# Altium PCB PowerBoard.PcbDoc (part 2 of 2)
Units mm, origin at the board's own origin, x right, y up, seen from the top; angles counter-clockwise.
Board outline 110 x 150 mm, 4 copper layers (Top Layer, Signal Layer 1, Signal Layer 2, Bottom Layer), stack 2.22 mm thick; 73 components, 20 nets, 361 pads, 2847 vias.
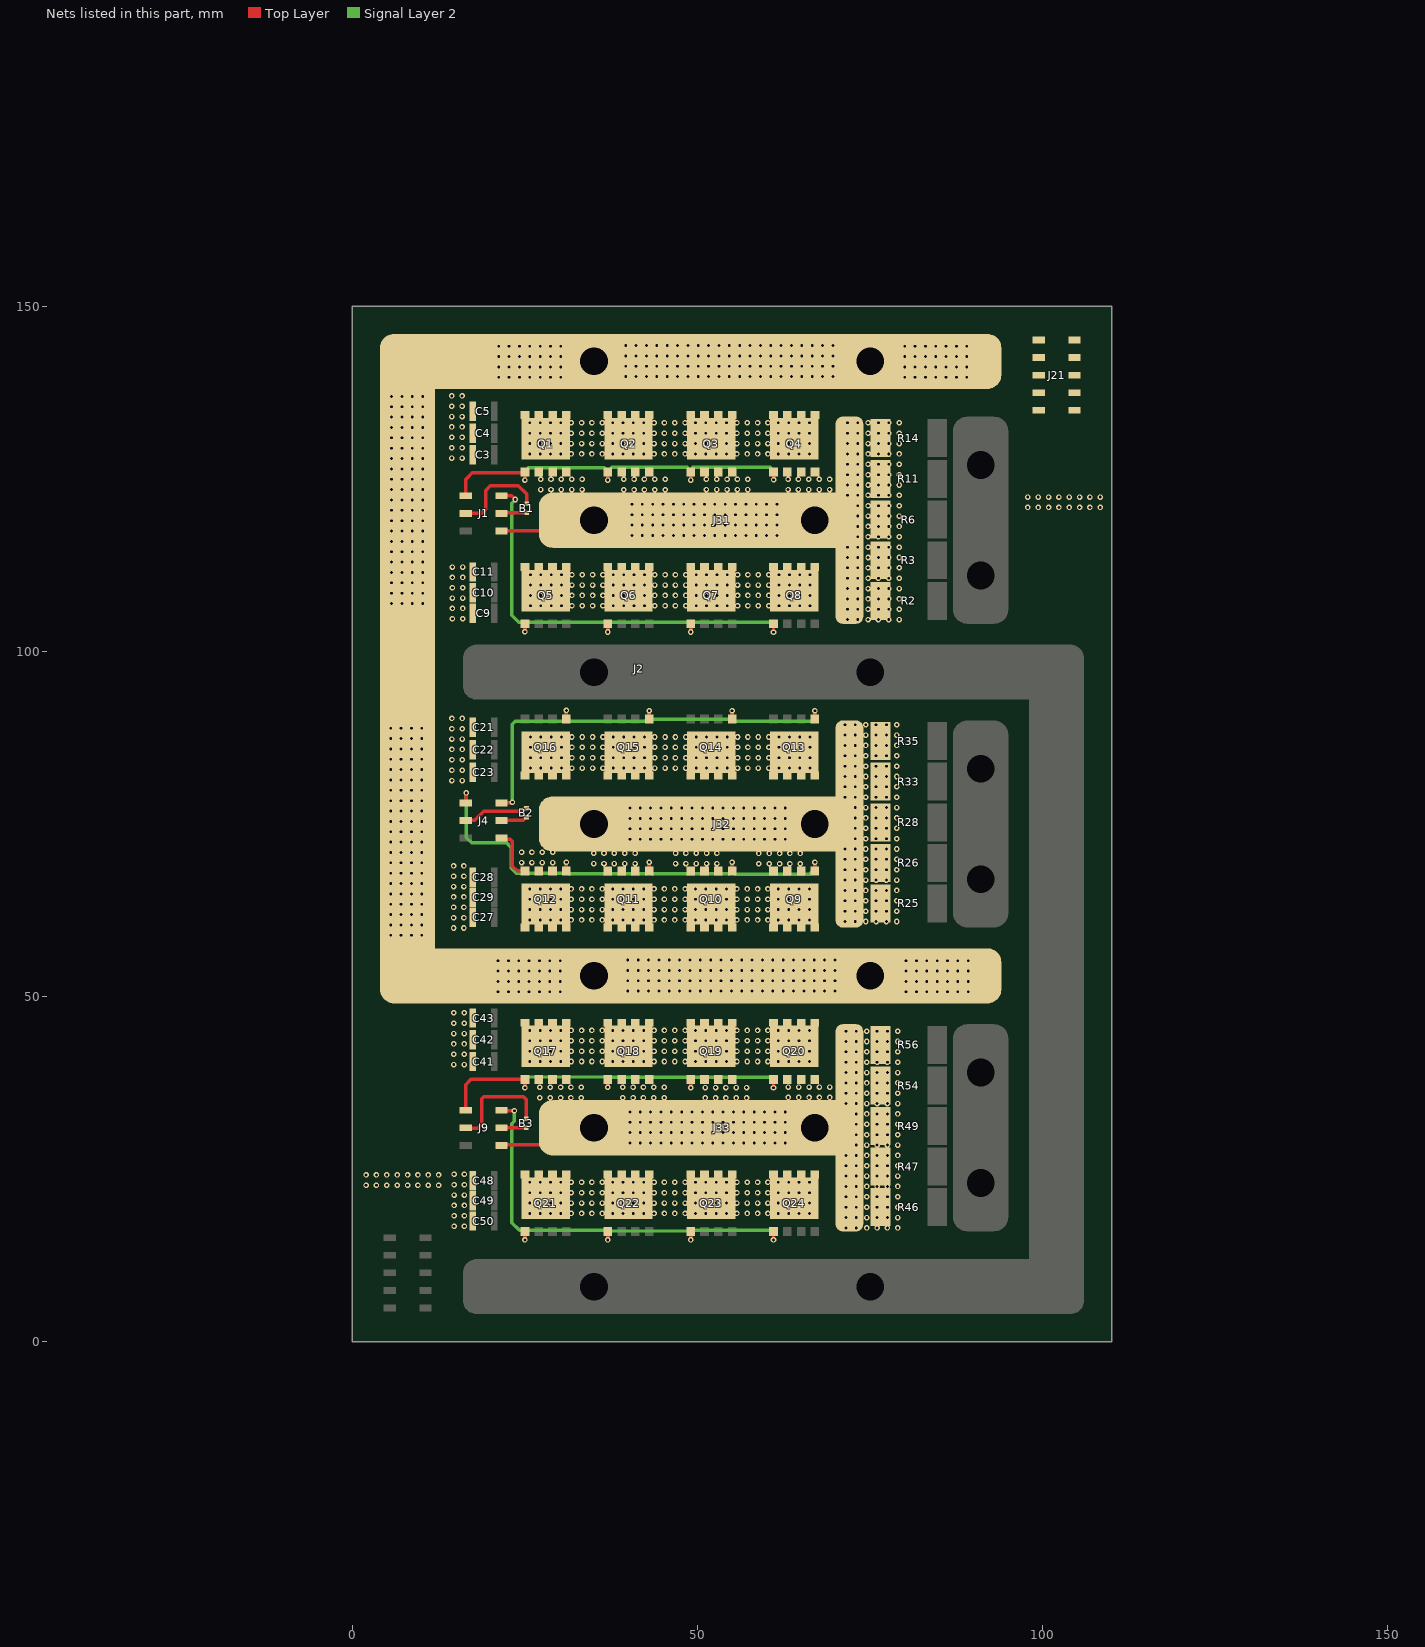
[diagram p4: the nets of this part, all layers, seen from the top]

## Via types
v1: diameter 0.8, hole 0.4, Top Layer to Bottom Layer, tented both sides, 2847 vias

## Nets (pads, with @x,y where several pads share a name; then routed paths per layer and width w, separated by ;. In a path a pad name is that pad's centre, name@x,y a point inside that pad or via, vN(x,y) a via of type N, cw(c..) or ccw(c..) an arc to the next point about the centre after c; other vN are vias at no path point) (continued)
PHASE_U: J1.6 J31.1 Q1.SOURCE Q2.SOURCE Q3.SOURCE Q4.SOURCE Q5.DRAIN Q6.DRAIN Q7.DRAIN Q8.DRAIN R2.2 R3.2 R6.2 R11.2 R14.2 | length 31.4
  Top Layer w0.5: J1.6@21.6,117.46 31.972,117.46 32.459,117.948 33.972,117.948 35,116.92 36.075,117.995 37.425,117.995 38.501,116.92 48,116.92 49.18,118.1 49.7,118.1 J31.1@50.6,119
  other v1: 71.7,104.6 73.2,104.6 74.7,104.6 76.2,104.6 77.7,104.6 79.2,104.6 71.7,106.1 73.2,106.1 74.7,106.1 76.2,106.1 77.7,106.1 79.2,106.1 25.8,106.6 27.3,106.6 28.8,106.6 30.3,106.6 31.8,106.6 33.3,106.6 34.8,106.6 36.3,106.6 37.8,106.6 39.3,106.6 40.8,106.6 42.3,106.6 43.8,106.6 45.3,106.6 46.8,106.6 48.3,106.6 49.8,106.6 51.3,106.6 52.8,106.6 54.3,106.6 55.8,106.6 57.3,106.6 58.8,106.6 60.3,106.6 61.8,106.6 63.3,106.6 64.8,106.6 66.3,106.6 71.7,107.6 73.2,107.6 74.7,107.6 76.2,107.6 77.7,107.6 79.2,107.6 25.8,108.1 27.3,108.1 28.8,108.1 30.3,108.1 31.8,108.1 33.3,108.1 34.8,108.1 36.3,108.1 37.8,108.1 39.3,108.1 40.8,108.1 42.3,108.1 43.8,108.1 45.3,108.1 46.8,108.1 48.3,108.1 49.8,108.1 51.3,108.1 52.8,108.1 54.3,108.1 55.8,108.1 57.3,108.1 58.8,108.1 60.3,108.1 61.8,108.1 63.3,108.1 64.8,108.1 66.3,108.1 71.7,109.1 73.2,109.1 74.7,109.1 76.2,109.1 77.7,109.1 79.2,109.1 25.8,109.6 27.3,109.6 28.8,109.6 30.3,109.6 31.8,109.6 33.3,109.6 34.8,109.6 36.3,109.6 37.8,109.6 39.3,109.6 40.8,109.6 42.3,109.6 43.8,109.6 45.3,109.6 46.8,109.6 48.3,109.6 49.8,109.6 51.3,109.6 52.8,109.6 54.3,109.6 55.8,109.6 57.3,109.6 58.8,109.6 60.3,109.6 61.8,109.6 63.3,109.6 64.8,109.6 66.3,109.6 71.7,110.6 73.2,110.6 74.7,110.6 76.2,110.6 77.7,110.6 79.2,110.6 25.8,111.1 27.3,111.1 28.8,111.1 30.3,111.1 31.8,111.1 33.3,111.1 34.8,111.1 36.3,111.1 37.8,111.1 39.3,111.1 40.8,111.1 42.3,111.1 43.8,111.1 45.3,111.1 46.8,111.1 48.3,111.1 49.8,111.1 51.3,111.1 52.8,111.1 54.3,111.1 55.8,111.1 57.3,111.1 58.8,111.1 60.3,111.1 61.8,111.1 63.3,111.1 64.8,111.1 66.3,111.1 71.7,112.1 73.2,112.1 74.7,112.1 76.2,112.1 77.7,112.1 79.2,112.1 71.7,113.6 73.2,113.6 74.7,113.6 76.2,113.6 77.7,113.6 79.2,113.6 71.7,115.1 73.2,115.1 74.7,115.1 76.2,115.1 77.7,115.1 79.2,115.1 73.2,116.6 74.7,116.6 76.2,116.6 77.7,116.6 79.2,116.6 40.5,116.8 42,116.8 43.5,116.8 45,116.8 46.5,116.8 48,116.8 49.5,116.8 51,116.8 52.5,116.8 54,116.8 55.5,116.8 57,116.8 58.5,116.8 60,116.8 61.5,116.8 73.2,118.1 74.7,118.1 76.2,118.1 77.7,118.1 79.2,118.1 40.5,118.3 42,118.3 43.5,118.3 45,118.3 46.5,118.3 48,118.3 49.5,118.3 51,118.3 52.5,118.3 54,118.3 55.5,118.3 57,118.3 58.5,118.3 60,118.3 61.5,118.3 73.2,119.6 74.7,119.6 76.2,119.6 77.7,119.6 79.2,119.6 40.5,119.8 42,119.8 43.5,119.8 45,119.8 46.5,119.8 48,119.8 49.5,119.8 51,119.8 52.5,119.8 54,119.8 55.5,119.8 57,119.8 58.5,119.8 60,119.8 61.5,119.8 73.2,121.1 74.7,121.1 76.2,121.1 77.7,121.1 79.2,121.1 40.5,121.3 42,121.3 43.5,121.3 45,121.3 46.5,121.3 48,121.3 49.5,121.3 51,121.3 52.5,121.3 54,121.3 55.5,121.3 57,121.3 58.5,121.3 60,121.3 61.5,121.3 71.7,122.6 73.2,122.6 74.7,122.6 76.2,122.6 77.7,122.6 79.2,122.6 39.314,123.419 40.814,123.419 42.314,123.419 43.814,123.419 45.314,123.419 27.274,123.444 28.774,123.444 30.274,123.444 31.774,123.444 33.274,123.444 51.277,123.444 52.777,123.444 54.277,123.444 55.777,123.444 57.277,123.444 63.113,123.444 64.613,123.444 66.113,123.444 67.613,123.444 69.113,123.444 71.7,124.1 73.2,124.1 74.7,124.1 76.2,124.1 77.7,124.1 79.2,124.1 39.314,124.919 40.814,124.919 42.314,124.919 43.814,124.919 45.314,124.919 27.274,124.944 28.774,124.944 30.274,124.944 31.774,124.944 33.274,124.944 51.277,124.944 52.777,124.944 54.277,124.944 55.777,124.944 57.277,124.944 63.113,124.944 64.613,124.944 66.113,124.944 67.613,124.944 69.113,124.944 71.7,125.6 73.2,125.6 74.7,125.6 76.2,125.6 77.7,125.6 79.2,125.6 71.7,127.1 73.2,127.1 74.7,127.1 76.2,127.1 77.7,127.1 79.2,127.1 71.7,128.6 73.2,128.6 74.7,128.6 76.2,128.6 77.7,128.6 79.2,128.6 71.7,130.1 73.2,130.1 74.7,130.1 76.2,130.1 77.7,130.1 79.2,130.1 71.7,131.6 73.2,131.6 74.7,131.6 76.2,131.6 77.7,131.6 79.2,131.6 71.7,133.1 73.2,133.1 74.7,133.1 76.2,133.1 77.7,133.1 79.2,133.1
PHASE_V: J4.6 J32.1 Q9.SOURCE Q10.SOURCE Q11.SOURCE Q12.SOURCE Q13.DRAIN Q14.DRAIN Q15.DRAIN Q16.DRAIN R25.2 R26.2 R28.2 R33.2 R35.2 | length 7.5
  Top Layer w0.5: J4.6@21.6,72.96 21.763,72.797 22.897,72.797 23.19,72.504 23.19,68.885 23.865,68.21 Q12.SOURCE@25,68.21
  other v1: 71.35,60.879 72.85,60.879 74.35,60.879 75.85,60.879 77.35,60.879 78.85,60.879 71.35,62.379 72.85,62.379 74.35,62.379 75.85,62.379 77.35,62.379 78.85,62.379 71.35,63.879 72.85,63.879 74.35,63.879 75.85,63.879 77.35,63.879 78.85,63.879 71.35,65.379 72.85,65.379 74.35,65.379 75.85,65.379 77.35,65.379 78.85,65.379 71.35,66.879 72.85,66.879 74.35,66.879 75.85,66.879 77.35,66.879 78.85,66.879 71.35,68.379 72.85,68.379 74.35,68.379 75.85,68.379 77.35,68.379 78.85,68.379 58.877,69.24 60.377,69.24 61.877,69.24 63.377,69.24 64.877,69.24 34.95,69.266 36.45,69.266 37.95,69.266 39.45,69.266 40.95,69.266 46.812,69.266 48.312,69.266 49.812,69.266 51.312,69.266 52.812,69.266 24.512,69.418 26.012,69.418 27.512,69.418 29.012,69.418 71.35,69.879 72.85,69.879 74.35,69.879 75.85,69.879 77.35,69.879 78.85,69.879 58.877,70.74 60.377,70.74 61.877,70.74 63.377,70.74 64.877,70.74 34.95,70.766 36.45,70.766 37.95,70.766 39.45,70.766 40.95,70.766 46.812,70.766 48.312,70.766 49.812,70.766 51.312,70.766 52.812,70.766 24.512,70.918 26.012,70.918 27.512,70.918 29.012,70.918 71.35,71.379 72.85,71.379 74.35,71.379 75.85,71.379 77.35,71.379 78.85,71.379 40.2,72.8 41.7,72.8 43.2,72.8 44.7,72.8 46.2,72.8 47.7,72.8 49.2,72.8 50.7,72.8 52.2,72.8 53.7,72.8 55.2,72.8 56.7,72.8 58.2,72.8 59.7,72.8 61.2,72.8 62.7,72.8 72.85,72.879 74.35,72.879 75.85,72.879 77.35,72.879 78.85,72.879 40.2,74.3 41.7,74.3 43.2,74.3 44.7,74.3 46.2,74.3 47.7,74.3 49.2,74.3 50.7,74.3 52.2,74.3 53.7,74.3 55.2,74.3 56.7,74.3 58.2,74.3 59.7,74.3 61.2,74.3 62.7,74.3 72.85,74.379 74.35,74.379 75.85,74.379 77.35,74.379 78.85,74.379 40.2,75.8 41.7,75.8 43.2,75.8 44.7,75.8 46.2,75.8 47.7,75.8 49.2,75.8 50.7,75.8 52.2,75.8 53.7,75.8 55.2,75.8 56.7,75.8 58.2,75.8 59.7,75.8 61.2,75.8 62.7,75.8 72.85,75.879 74.35,75.879 75.85,75.879 77.35,75.879 78.85,75.879 40.2,77.3 41.7,77.3 43.2,77.3 44.7,77.3 46.2,77.3 47.7,77.3 49.2,77.3 50.7,77.3 52.2,77.3 53.7,77.3 55.2,77.3 56.7,77.3 58.2,77.3 59.7,77.3 61.2,77.3 62.7,77.3 72.85,77.379 74.35,77.379 75.85,77.379 77.35,77.379 78.85,77.379 71.35,78.879 72.85,78.879 74.35,78.879 75.85,78.879 77.35,78.879 78.85,78.879 71.35,80.379 72.85,80.379 74.35,80.379 75.85,80.379 77.35,80.379 78.85,80.379 71.35,81.879 72.85,81.879 74.35,81.879 75.85,81.879 77.35,81.879 78.85,81.879 25.8,83.1 27.3,83.1 28.8,83.1 30.3,83.1 31.8,83.1 33.3,83.1 34.8,83.1 36.3,83.1 37.8,83.1 39.3,83.1 40.8,83.1 42.3,83.1 43.8,83.1 45.3,83.1 46.8,83.1 48.3,83.1 49.8,83.1 51.3,83.1 52.8,83.1 54.3,83.1 55.8,83.1 57.3,83.1 58.8,83.1 60.3,83.1 61.8,83.1 63.3,83.1 64.8,83.1 66.3,83.1 71.35,83.379 72.85,83.379 74.35,83.379 75.85,83.379 77.35,83.379 78.85,83.379 25.8,84.6 27.3,84.6 28.8,84.6 30.3,84.6 31.8,84.6 33.3,84.6 34.8,84.6 36.3,84.6 37.8,84.6 39.3,84.6 40.8,84.6 42.3,84.6 43.8,84.6 45.3,84.6 46.8,84.6 48.3,84.6 49.8,84.6 51.3,84.6 52.8,84.6 54.3,84.6 55.8,84.6 57.3,84.6 58.8,84.6 60.3,84.6 61.8,84.6 63.3,84.6 64.8,84.6 66.3,84.6 71.35,84.879 72.85,84.879 74.35,84.879 75.85,84.879 77.35,84.879 78.85,84.879 25.8,86.1 27.3,86.1 28.8,86.1 30.3,86.1 31.8,86.1 33.3,86.1 34.8,86.1 36.3,86.1 37.8,86.1 39.3,86.1 40.8,86.1 42.3,86.1 43.8,86.1 45.3,86.1 46.8,86.1 48.3,86.1 49.8,86.1 51.3,86.1 52.8,86.1 54.3,86.1 55.8,86.1 57.3,86.1 58.8,86.1 60.3,86.1 61.8,86.1 63.3,86.1 64.8,86.1 66.3,86.1 71.35,86.379 72.85,86.379 74.35,86.379 75.85,86.379 77.35,86.379 78.85,86.379 25.8,87.6 27.3,87.6 28.8,87.6 30.3,87.6 31.8,87.6 33.3,87.6 34.8,87.6 36.3,87.6 37.8,87.6 39.3,87.6 40.8,87.6 42.3,87.6 43.8,87.6 45.3,87.6 46.8,87.6 48.3,87.6 49.8,87.6 51.3,87.6 52.8,87.6 54.3,87.6 55.8,87.6 57.3,87.6 58.8,87.6 60.3,87.6 61.8,87.6 63.3,87.6 64.8,87.6 66.3,87.6 71.35,87.879 72.85,87.879 74.35,87.879 75.85,87.879 77.35,87.879 78.85,87.879 71.35,89.379 72.85,89.379 74.35,89.379 75.85,89.379 77.35,89.379 78.85,89.379
PHASE_W: J9.6 J33.1 Q17.SOURCE Q18.SOURCE Q19.SOURCE Q20.SOURCE Q21.DRAIN Q22.DRAIN Q23.DRAIN Q24.DRAIN R46.2 R47.2 R49.2 R54.2 R56.2 | length 6
  Top Layer w0.5: J9.6@21.643,28.524 J33.1@27.137,28.524 ; Q21.DRAIN@25.05,24.21 Q21.DRAIN@25.375,24.535
  other v1: 71.5,16.5 73,16.5 74.5,16.5 76,16.5 77.5,16.5 79,16.5 71.5,18 73,18 74.5,18 76,18 77.5,18 79,18 25.7,18.6 27.2,18.6 28.7,18.6 30.2,18.6 31.7,18.6 33.2,18.6 34.7,18.6 36.2,18.6 37.7,18.6 39.2,18.6 40.7,18.6 42.2,18.6 43.7,18.6 45.2,18.6 46.7,18.6 48.2,18.6 49.7,18.6 51.2,18.6 52.7,18.6 54.2,18.6 55.7,18.6 57.2,18.6 58.7,18.6 60.2,18.6 61.7,18.6 63.2,18.6 64.7,18.6 66.2,18.6 71.5,19.5 73,19.5 74.5,19.5 76,19.5 77.5,19.5 79,19.5 25.7,20.1 27.2,20.1 28.7,20.1 30.2,20.1 31.7,20.1 33.2,20.1 34.7,20.1 36.2,20.1 37.7,20.1 39.2,20.1 40.7,20.1 42.2,20.1 43.7,20.1 45.2,20.1 46.7,20.1 48.2,20.1 49.7,20.1 51.2,20.1 52.7,20.1 54.2,20.1 55.7,20.1 57.2,20.1 58.7,20.1 60.2,20.1 61.7,20.1 63.2,20.1 64.7,20.1 66.2,20.1 71.5,21 73,21 74.5,21 76,21 77.5,21 79,21 25.7,21.6 27.2,21.6 28.7,21.6 30.2,21.6 31.7,21.6 33.2,21.6 34.7,21.6 36.2,21.6 37.7,21.6 39.2,21.6 40.7,21.6 42.2,21.6 43.7,21.6 45.2,21.6 46.7,21.6 48.2,21.6 49.7,21.6 51.2,21.6 52.7,21.6 54.2,21.6 55.7,21.6 57.2,21.6 58.7,21.6 60.2,21.6 61.7,21.6 63.2,21.6 64.7,21.6 66.2,21.6 71.5,22.5 73,22.5 74.5,22.5 76,22.5 77.5,22.5 79,22.5 25.7,23.1 27.2,23.1 28.7,23.1 30.2,23.1 31.7,23.1 33.2,23.1 34.7,23.1 36.2,23.1 37.7,23.1 39.2,23.1 40.7,23.1 42.2,23.1 43.7,23.1 45.2,23.1 46.7,23.1 48.2,23.1 49.7,23.1 51.2,23.1 52.7,23.1 54.2,23.1 55.7,23.1 57.2,23.1 58.7,23.1 60.2,23.1 61.7,23.1 63.2,23.1 64.7,23.1 66.2,23.1 71.5,24 73,24 74.5,24 76,24 77.5,24 79,24 71.5,25.5 73,25.5 74.5,25.5 76,25.5 77.5,25.5 79,25.5 71.5,27 73,27 74.5,27 76,27 77.5,27 79,27 73,28.5 74.5,28.5 76,28.5 77.5,28.5 79,28.5 40.2,28.8 41.7,28.8 43.2,28.8 44.7,28.8 46.2,28.8 47.7,28.8 49.2,28.8 50.7,28.8 52.2,28.8 53.7,28.8 55.2,28.8 56.7,28.8 58.2,28.8 59.7,28.8 61.2,28.8 62.7,28.8 73,30 74.5,30 76,30 77.5,30 79,30 40.2,30.3 41.7,30.3 43.2,30.3 44.7,30.3 46.2,30.3 47.7,30.3 49.2,30.3 50.7,30.3 52.2,30.3 53.7,30.3 55.2,30.3 56.7,30.3 58.2,30.3 59.7,30.3 61.2,30.3 62.7,30.3 73,31.5 74.5,31.5 76,31.5 77.5,31.5 79,31.5 40.2,31.8 41.7,31.8 43.2,31.8 44.7,31.8 46.2,31.8 47.7,31.8 49.2,31.8 50.7,31.8 52.2,31.8 53.7,31.8 55.2,31.8 56.7,31.8 58.2,31.8 59.7,31.8 61.2,31.8 62.7,31.8 73,33 74.5,33 76,33 77.5,33 79,33 40.2,33.3 41.7,33.3 43.2,33.3 44.7,33.3 46.2,33.3 47.7,33.3 49.2,33.3 50.7,33.3 52.2,33.3 53.7,33.3 55.2,33.3 56.7,33.3 58.2,33.3 59.7,33.3 61.2,33.3 62.7,33.3 71.5,34.5 73,34.5 74.5,34.5 76,34.5 77.5,34.5 79,34.5 51.105,35.33 52.605,35.33 54.105,35.33 55.605,35.33 57.105,35.33 27.153,35.355 28.653,35.355 30.153,35.355 31.653,35.355 33.153,35.355 39.167,35.355 40.667,35.355 42.167,35.355 43.667,35.355 45.167,35.355 63.144,35.406 64.644,35.406 66.144,35.406 67.644,35.406 69.144,35.406 71.5,36 73,36 74.5,36 76,36 77.5,36 79,36 51.105,36.83 52.605,36.83 54.105,36.83 55.605,36.83 57.105,36.83 27.153,36.855 28.653,36.855 30.153,36.855 31.653,36.855 33.153,36.855 39.167,36.855 40.667,36.855 42.167,36.855 43.667,36.855 45.167,36.855 63.144,36.906 64.644,36.906 66.144,36.906 67.644,36.906 69.144,36.906 71.5,37.5 73,37.5 74.5,37.5 76,37.5 77.5,37.5 79,37.5 71.5,39 73,39 74.5,39 76,39 77.5,39 79,39 71.5,40.5 73,40.5 74.5,40.5 76,40.5 77.5,40.5 79,40.5 71.5,42 73,42 74.5,42 76,42 77.5,42 79,42 71.5,43.5 73,43.5 74.5,43.5 76,43.5 77.5,43.5 79,43.5 71.5,45 73,45 74.5,45 76,45 77.5,45 79,45
PWM_U_HIGH: J1.1 Q1.GATE Q2.GATE Q3.GATE Q4.GATE | length 58.7
  Top Layer w0.5: J1.1@16.457,122.54 16.457,124.957 17.394,125.894 24.894,125.894 Q1.GATE@25.005,126.005 v1(25.005,124.812) ; v1(37,124.812) Q2.GATE@37,126.005 ; v1(49.007,124.812) Q3.GATE@49.007,126.005 ; v1(61.007,124.862) Q4.GATE@61.007,125.902
  Signal Layer 2 w0.5: v1(25.005,124.812) 25.005,126.147 25.476,126.619 36.474,126.619 37,126.093 ; v1(37,124.812) 37,126.093 ; v1(49.007,124.812) 49.007,126.125 ; v1(61.007,124.862) 61.007,126.191 60.554,126.644 49.3,126.644 49.007,126.352 49.007,126.125 ; 37,126.093 37.551,126.644 48.487,126.644 48.858,126.274 49.007,126.125
PWM_U_LOW: J1.2 Q5.GATE Q6.GATE Q7.GATE Q8.GATE | length 68.1
  Top Layer w0.5: J1.2@21.6,122.54 23.06,122.54 v1(23.6,122) ; v1(25,102.857) Q5.GATE@25,104 ; v1(37,102.807) Q6.GATE@37,104 ; v1(49,102.807) Q7.GATE@49,104 ; v1(61,102.757) Q8.GATE@61,104
  Signal Layer 2 w0.5: v1(23.6,122) 23.6,121.919 23.114,121.433 23.114,105.232 24.105,104.242 25.476,104.242 ; v1(25,102.857) 25,103.765 25.476,104.242 ; v1(37,102.807) 37,103.726 37.516,104.242 ; v1(49,102.807) 49,103.813 ; v1(61,102.757) 61,103.922 60.681,104.242 49.428,104.242 49,103.813 ; 25.476,104.242 37.516,104.242 ; 37.516,104.242 48.572,104.242 49,103.813
PWM_V_HIGH: J4.1 Q9.GATE Q10.GATE Q11.GATE Q12.GATE | length 72.9
  Top Layer w0.5: 16.5,78.54 v1(16.5,79.5) ; Q12.GATE@31,68.21 v1(31,69.453) ; Q11.GATE@43,68.21 v1(43,69.453) ; Q10.GATE@55,68.21 v1(55,69.453) ; Q9.GATE@67,68.21 v1(67,69.453)
  Signal Layer 2 w0.5: v1(16.5,79.5) 16.5,73.035 17.272,72.263 22.327,72.263 23.012,71.577 23.012,68.58 23.749,67.843 30.633,67.843 31,68.21 ; v1(31,69.453) 31,68.21 ; v1(43,69.453) 43,68.21 ; v1(55,69.453) 55,68.21 ; v1(67,69.453) 67,68.473 66.218,67.691 55.519,67.691 55,68.21 ; 31,68.21 31.417,67.793 42.583,67.793 43,68.21 ; 43,68.21 43.443,67.767 54.557,67.767 55,68.21
PWM_V_LOW: J4.2 Q13.GATE Q14.GATE Q15.GATE Q16.GATE | length 67
  Top Layer w0.5: J4.2@21.766,77.806 22.058,78.098 23.133,78.098 v1(23.19,78.156) ; Q16.GATE@31,90.21 v1(31,91.453) ; Q15.GATE@43,90.21 v1(43,91.403) ; Q14.GATE@55,90.21 v1(55,91.403) ; Q13.GATE@67,90.21 v1(67,91.403)
  Signal Layer 2 w0.5: v1(23.19,78.156) 23.165,78.181 23.165,89.459 23.571,89.865 30.377,89.865 31,90.488 ; v1(31,91.453) 31,90.488 ; v1(43,91.403) 43,90.502 ; v1(55,91.403) 55,90.491 ; v1(67,91.403) 67,90.419 66.457,89.876 55.615,89.876 55,90.491 ; 31,90.488 31.598,89.891 42.388,89.891 43,90.502 ; 43,90.502 43.304,90.198 54.707,90.198 55,90.491
PWM_W_HIGH: J9.1 Q17.GATE Q18.GATE Q19.GATE Q20.GATE | length 58.7
  Top Layer w0.5: J9.1@16.4,33.54 16.4,37.228 17.172,38 Q17.GATE@25,38 v1(25,36.807) ; v1(37,36.857) Q18.GATE@37,38 ; v1(49,36.807) Q19.GATE@49,38 ; v1(61,36.807) Q20.GATE@61,38
  Signal Layer 2 w0.5: v1(25,36.807) 25,37.827 25.527,38.354 36.474,38.354 37.033,37.795 ; v1(37,36.857) 37.033,36.89 37.033,37.795 ; v1(49,36.807) 49,37.741 ; v1(61,36.807) 61,37.908 60.579,38.329 49.588,38.329 49,37.741 ; 37.033,37.795 37.567,38.329 48.412,38.329 49,37.741
PWM_W_LOW: J9.2 Q21.GATE Q22.GATE Q23.GATE Q24.GATE | length 66.7
  Top Layer w0.5: J9.2@21.702,33.477 v1(23.47,33.477) ; v1(25,14.757) Q21.GATE@25,16 ; v1(37,14.757) Q22.GATE@37,16 ; v1(49,14.757) Q23.GATE@49,16 ; v1(61,14.757) Q24.GATE@61,16
  Signal Layer 2 w0.5: v1(23.47,33.477) 23.47,31.928 23.114,31.572 23.114,17.247 24.217,16.143 25.414,16.143 ; v1(25,14.757) 25,15.729 25.414,16.143 ; v1(37,14.757) 37,15.756 ; v1(49,14.757) 49,15.701 ; v1(61,14.757) 61,15.784 60.641,16.143 49.443,16.143 49,15.701 ; 25.414,16.143 36.612,16.143 37,15.756 ; 37,15.756 37.293,16.049 48.652,16.049 49,15.701
TEMP_U: B1.2 J1.4 | length 3.7
  Top Layer w0.5: J1.4@21.6,120 21.676,120.076 B1.2@25.273,120.076
TEMP_U_VDD: B1.1 J1.3 | length 14
  Top Layer w0.5: J1.3@16.385,120.015 18.72,120.015 19.3,120.595 19.3,123.3 20,124 24.048,124 25.25,122.798 B1.1@25.25,121.376
TEMP_V: B2.2 J4.4 | length 3.9
  Top Layer w0.5: J4.4@21.538,75.54 24.78,75.54 25.122,75.882 25.122,75.907 25.197,75.982 B2.2@25.222,75.982
TEMP_V_VDD: B2.1 J4.3 | length 9.7
  Top Layer w0.5: J4.3@16.286,75.54 16.288,75.542 17.757,75.542 19.05,76.835 24.481,76.835 24.853,77.207 25.147,77.207 B2.1@25.222,77.282
TEMP_W: B3.2 J9.4 | length 3.6
  Top Layer w0.5: J9.4@21.6,31 B3.2@25.2,31
TEMP_W_VDD: B3.1 J9.3 | length 15.8
  Top Layer w0.5: J9.3@16.398,30.963 18.161,30.963 18.72,31.521 18.72,35.214 19.013,35.507 24.793,35.507 25.2,35.1 B3.1@25.2,32.3
VIN+: C3.2 C4.2 C5.2 C9.1 C10.1 C11.1 C21.2 C22.2 C23.2 C27.1 C28.1 C29.1 C41.2 C42.2 C43.2 C48.1 C49.1 C50.1 J2.1 J21.1 J21.2 J21.3 J21.4 J21.5 J21.6 J21.7 J21.8 J21.9 J21.10 Q1.DRAIN Q2.DRAIN Q3.DRAIN Q4.DRAIN Q9.DRAIN Q10.DRAIN Q11.DRAIN Q12.DRAIN Q17.DRAIN Q18.DRAIN Q19.DRAIN Q20.DRAIN
  other v1: 14.731,16.757 16.231,16.757 14.731,18.257 16.231,18.257 14.731,19.757 16.231,19.757 14.731,21.257 16.231,21.257 1.997,22.681 3.497,22.681 4.997,22.681 6.497,22.681 7.997,22.681 9.497,22.681 10.997,22.681 12.497,22.681 14.731,22.757 16.231,22.757 1.997,24.181 3.497,24.181 4.997,24.181 6.497,24.181 7.997,24.181 9.497,24.181 10.997,24.181 12.497,24.181 14.731,24.257 16.231,24.257 14.705,40.149 16.205,40.149 25.7,40.6 27.2,40.6 28.7,40.6 30.2,40.6 31.7,40.6 33.2,40.6 34.7,40.6 36.2,40.6 37.7,40.6 39.2,40.6 40.7,40.6 42.2,40.6 43.7,40.6 45.2,40.6 46.7,40.6 48.2,40.6 49.7,40.6 51.2,40.6 52.7,40.6 54.2,40.6 55.7,40.6 57.2,40.6 58.7,40.6 60.2,40.6 61.7,40.6 63.2,40.6 64.7,40.6 66.2,40.6 14.705,41.649 16.205,41.649 25.7,42.1 27.2,42.1 28.7,42.1 30.2,42.1 31.7,42.1 33.2,42.1 34.7,42.1 36.2,42.1 37.7,42.1 39.2,42.1 40.7,42.1 42.2,42.1 43.7,42.1 45.2,42.1 46.7,42.1 48.2,42.1 49.7,42.1 51.2,42.1 52.7,42.1 54.2,42.1 55.7,42.1 57.2,42.1 58.7,42.1 60.2,42.1 61.7,42.1 63.2,42.1 64.7,42.1 66.2,42.1 14.705,43.149 16.205,43.149 25.7,43.6 27.2,43.6 28.7,43.6 30.2,43.6 31.7,43.6 33.2,43.6 34.7,43.6 36.2,43.6 37.7,43.6 39.2,43.6 40.7,43.6 42.2,43.6 43.7,43.6 45.2,43.6 46.7,43.6 48.2,43.6 49.7,43.6 51.2,43.6 52.7,43.6 54.2,43.6 55.7,43.6 57.2,43.6 58.7,43.6 60.2,43.6 61.7,43.6 63.2,43.6 64.7,43.6 66.2,43.6 14.705,44.649 16.205,44.649 25.7,45.1 27.2,45.1 28.7,45.1 30.2,45.1 31.7,45.1 33.2,45.1 34.7,45.1 36.2,45.1 37.7,45.1 39.2,45.1 40.7,45.1 42.2,45.1 43.7,45.1 45.2,45.1 46.7,45.1 48.2,45.1 49.7,45.1 51.2,45.1 52.7,45.1 54.2,45.1 55.7,45.1 57.2,45.1 58.7,45.1 60.2,45.1 61.7,45.1 63.2,45.1 64.7,45.1 66.2,45.1 14.705,46.149 16.205,46.149 14.705,47.649 16.205,47.649 21.1,50.7 22.6,50.7 24.1,50.7 25.6,50.7 27.1,50.7 28.6,50.7 30.1,50.7 80.2,50.7 81.7,50.7 83.2,50.7 84.7,50.7 86.2,50.7 87.7,50.7 89.2,50.7 39.9,50.8 41.4,50.8 42.9,50.8 44.4,50.8 45.9,50.8 47.4,50.8 48.9,50.8 50.4,50.8 51.9,50.8 53.4,50.8 54.9,50.8 56.4,50.8 57.9,50.8 59.4,50.8 60.9,50.8 62.4,50.8 63.9,50.8 65.4,50.8 66.9,50.8 68.4,50.8 69.9,50.8 21.1,52.2 22.6,52.2 24.1,52.2 25.6,52.2 27.1,52.2 28.6,52.2 30.1,52.2 80.2,52.2 81.7,52.2 83.2,52.2 84.7,52.2 86.2,52.2 87.7,52.2 89.2,52.2 39.9,52.3 41.4,52.3 42.9,52.3 44.4,52.3 45.9,52.3 47.4,52.3 48.9,52.3 50.4,52.3 51.9,52.3 53.4,52.3 54.9,52.3 56.4,52.3 57.9,52.3 59.4,52.3 60.9,52.3 62.4,52.3 63.9,52.3 65.4,52.3 66.9,52.3 68.4,52.3 69.9,52.3 21.1,53.7 22.6,53.7 24.1,53.7 25.6,53.7 27.1,53.7 28.6,53.7 30.1,53.7 80.2,53.7 81.7,53.7 83.2,53.7 84.7,53.7 86.2,53.7 87.7,53.7 89.2,53.7 39.9,53.8 41.4,53.8 42.9,53.8 44.4,53.8 45.9,53.8 47.4,53.8 48.9,53.8 50.4,53.8 51.9,53.8 53.4,53.8 54.9,53.8 56.4,53.8 57.9,53.8 59.4,53.8 60.9,53.8 62.4,53.8 63.9,53.8 65.4,53.8 66.9,53.8 68.4,53.8 69.9,53.8 21.1,55.2 22.6,55.2 24.1,55.2 25.6,55.2 27.1,55.2 28.6,55.2 30.1,55.2 80.2,55.2 81.7,55.2 83.2,55.2 84.7,55.2 86.2,55.2 87.7,55.2 89.2,55.2 39.9,55.3 41.4,55.3 42.9,55.3 44.4,55.3 45.9,55.3 47.4,55.3 48.9,55.3 50.4,55.3 51.9,55.3 53.4,55.3 54.9,55.3 56.4,55.3 57.9,55.3 59.4,55.3 60.9,55.3 62.4,55.3 63.9,55.3 65.4,55.3 66.9,55.3 68.4,55.3 69.9,55.3 5.563,58.875 7.063,58.875 8.563,58.875 10.063,58.875 14.654,59.936 16.154,59.936 5.563,60.375 7.063,60.375 8.563,60.375 10.063,60.375 25.7,61.1 27.2,61.1 28.7,61.1 30.2,61.1 31.7,61.1 33.2,61.1 34.7,61.1 36.2,61.1 37.7,61.1 39.2,61.1 40.7,61.1 42.2,61.1 43.7,61.1 45.2,61.1 46.7,61.1 48.2,61.1 49.7,61.1 51.2,61.1 52.7,61.1 54.2,61.1 55.7,61.1 57.2,61.1 58.7,61.1 60.2,61.1 61.7,61.1 63.2,61.1 64.7,61.1 66.2,61.1 14.654,61.436 16.154,61.436 5.563,61.875 7.063,61.875 8.563,61.875 10.063,61.875 25.7,62.6 27.2,62.6 28.7,62.6 30.2,62.6 31.7,62.6 33.2,62.6 34.7,62.6 36.2,62.6 37.7,62.6 39.2,62.6 40.7,62.6 42.2,62.6 43.7,62.6 45.2,62.6 46.7,62.6 48.2,62.6 49.7,62.6 51.2,62.6 52.7,62.6 54.2,62.6 55.7,62.6 57.2,62.6 58.7,62.6 60.2,62.6 61.7,62.6 63.2,62.6 64.7,62.6 66.2,62.6 14.654,62.936 16.154,62.936 5.563,63.375 7.063,63.375 8.563,63.375 10.063,63.375 25.7,64.1 27.2,64.1 28.7,64.1 30.2,64.1 31.7,64.1 33.2,64.1 34.7,64.1 36.2,64.1 37.7,64.1 39.2,64.1 40.7,64.1 42.2,64.1 43.7,64.1 45.2,64.1 46.7,64.1 48.2,64.1 49.7,64.1 51.2,64.1 52.7,64.1 54.2,64.1 55.7,64.1 57.2,64.1 58.7,64.1 60.2,64.1 61.7,64.1 63.2,64.1 64.7,64.1 66.2,64.1 14.654,64.436 16.154,64.436 5.563,64.875 7.063,64.875 8.563,64.875 10.063,64.875 25.7,65.6 27.2,65.6 28.7,65.6 30.2,65.6 31.7,65.6 33.2,65.6 34.7,65.6 36.2,65.6 37.7,65.6 39.2,65.6 40.7,65.6 42.2,65.6 43.7,65.6 45.2,65.6 46.7,65.6 48.2,65.6 49.7,65.6 51.2,65.6 52.7,65.6 54.2,65.6 55.7,65.6 57.2,65.6 58.7,65.6 60.2,65.6 61.7,65.6 63.2,65.6 64.7,65.6 66.2,65.6 14.654,65.936 16.154,65.936 5.563,66.375 7.063,66.375 8.563,66.375 10.063,66.375 14.654,67.436 16.154,67.436 5.563,67.875 7.063,67.875 8.563,67.875 10.063,67.875 14.654,68.936 16.154,68.936 5.563,69.375 7.063,69.375 8.563,69.375 10.063,69.375 5.563,70.875 7.063,70.875 8.563,70.875 10.063,70.875 5.563,72.375 7.063,72.375 8.563,72.375 10.063,72.375 5.563,73.875 7.063,73.875 8.563,73.875 10.063,73.875 5.563,75.375 7.063,75.375 8.563,75.375 10.063,75.375 5.563,76.875 7.063,76.875 8.563,76.875 10.063,76.875 5.563,78.375 7.063,78.375 8.563,78.375 10.063,78.375 5.563,79.875 7.063,79.875 8.563,79.875 10.063,79.875 14.423,81.296 15.923,81.296 5.563,81.375 7.063,81.375 8.563,81.375 10.063,81.375 14.423,82.796 15.923,82.796 5.563,82.875 7.063,82.875 8.563,82.875 10.063,82.875 14.423,84.296 15.923,84.296 5.563,84.375 7.063,84.375 8.563,84.375 10.063,84.375 14.423,85.796 15.923,85.796 5.563,85.875 7.063,85.875 8.563,85.875 10.063,85.875 14.423,87.296 15.923,87.296 5.563,87.375 7.063,87.375 8.563,87.375 10.063,87.375 14.423,88.796 15.923,88.796 5.563,88.875 7.063,88.875 8.563,88.875 10.063,88.875 14.423,90.296 15.923,90.296 14.499,104.717 15.999,104.717 14.499,106.217 15.999,106.217 5.69,106.931 7.19,106.931 8.69,106.931 10.19,106.931 14.499,107.717 15.999,107.717 5.69,108.431 7.19,108.431 8.69,108.431 10.19,108.431 14.499,109.217 15.999,109.217 5.69,109.931 7.19,109.931 8.69,109.931 10.19,109.931 14.499,110.717 15.999,110.717 5.69,111.431 7.19,111.431 8.69,111.431 10.19,111.431 14.499,112.217 15.999,112.217 5.69,112.931 7.19,112.931 8.69,112.931 10.19,112.931 5.69,114.431 7.19,114.431 8.69,114.431 10.19,114.431 5.69,115.931 7.19,115.931 8.69,115.931 10.19,115.931 5.69,117.431 7.19,117.431 8.69,117.431 10.19,117.431 5.69,118.931 7.19,118.931 8.69,118.931 10.19,118.931 5.69,120.431 7.19,120.431 8.69,120.431 10.19,120.431 97.832,120.852 99.332,120.852 100.832,120.852 102.332,120.852 103.832,120.852 105.332,120.852 106.832,120.852 108.332,120.852 5.69,121.931 7.19,121.931 8.69,121.931 10.19,121.931 97.832,122.352 99.332,122.352 100.832,122.352 102.332,122.352 103.832,122.352 105.332,122.352 106.832,122.352 108.332,122.352 5.69,123.431 7.19,123.431 8.69,123.431 10.19,123.431 5.69,124.931 7.19,124.931 8.69,124.931 10.19,124.931 5.69,126.431 7.19,126.431 8.69,126.431 10.19,126.431 5.69,127.931 7.19,127.931 8.69,127.931 10.19,127.931 14.398,128.007 15.898,128.007 25.7,128.6 27.2,128.6 28.7,128.6 30.2,128.6 31.7,128.6 33.2,128.6 34.7,128.6 36.2,128.6 37.7,128.6 39.2,128.6 40.7,128.6 42.2,128.6 43.7,128.6 45.2,128.6 46.7,128.6 48.2,128.6 49.7,128.6 51.2,128.6 52.7,128.6 54.2,128.6 55.7,128.6 57.2,128.6 58.7,128.6 60.2,128.6 61.7,128.6 63.2,128.6 64.7,128.6 66.2,128.6 5.69,129.431 7.19,129.431 8.69,129.431 10.19,129.431 14.398,129.507 15.898,129.507 25.7,130.1 27.2,130.1 28.7,130.1 30.2,130.1 31.7,130.1 33.2,130.1 34.7,130.1 36.2,130.1 37.7,130.1 39.2,130.1 40.7,130.1 42.2,130.1 43.7,130.1 45.2,130.1 46.7,130.1 48.2,130.1 49.7,130.1 51.2,130.1 52.7,130.1 54.2,130.1 55.7,130.1 57.2,130.1 58.7,130.1 60.2,130.1 61.7,130.1 63.2,130.1 64.7,130.1 66.2,130.1 5.69,130.931 7.19,130.931 8.69,130.931 10.19,130.931 14.398,131.007 15.898,131.007 25.7,131.6 27.2,131.6 28.7,131.6 30.2,131.6 31.7,131.6 33.2,131.6 34.7,131.6 36.2,131.6 37.7,131.6 39.2,131.6 40.7,131.6 42.2,131.6 43.7,131.6 45.2,131.6 46.7,131.6 48.2,131.6 49.7,131.6 51.2,131.6 52.7,131.6 54.2,131.6 55.7,131.6 57.2,131.6 58.7,131.6 60.2,131.6 61.7,131.6 63.2,131.6 64.7,131.6 66.2,131.6 5.69,132.431 7.19,132.431 8.69,132.431 10.19,132.431 14.398,132.507 15.898,132.507 25.7,133.1 27.2,133.1 28.7,133.1 30.2,133.1 31.7,133.1 33.2,133.1 34.7,133.1 36.2,133.1 37.7,133.1 39.2,133.1 40.7,133.1 42.2,133.1 43.7,133.1 45.2,133.1 46.7,133.1 48.2,133.1 49.7,133.1 51.2,133.1 52.7,133.1 54.2,133.1 55.7,133.1 57.2,133.1 58.7,133.1 60.2,133.1 61.7,133.1 63.2,133.1 64.7,133.1 66.2,133.1 5.69,133.931 7.19,133.931 8.69,133.931 10.19,133.931 14.398,134.007 15.898,134.007 5.69,135.431 7.19,135.431 8.69,135.431 10.19,135.431 14.398,135.507 15.898,135.507 5.69,136.931 7.19,136.931 8.69,136.931 10.19,136.931 14.398,137.007 15.898,137.007 21.2,139.7 22.7,139.7 24.2,139.7 25.7,139.7 27.2,139.7 28.7,139.7 30.2,139.7 80,139.7 81.5,139.7 83,139.7 84.5,139.7 86,139.7 87.5,139.7 89,139.7 39.6,139.8 41.1,139.8 42.6,139.8 44.1,139.8 45.6,139.8 47.1,139.8 48.6,139.8 50.1,139.8 51.6,139.8 53.1,139.8 54.6,139.8 56.1,139.8 57.6,139.8 59.1,139.8 60.6,139.8 62.1,139.8 63.6,139.8 65.1,139.8 66.6,139.8 68.1,139.8 69.6,139.8 21.2,141.2 22.7,141.2 24.2,141.2 25.7,141.2 27.2,141.2 28.7,141.2 30.2,141.2 80,141.2 81.5,141.2 83,141.2 84.5,141.2 86,141.2 87.5,141.2 89,141.2 39.6,141.3 41.1,141.3 42.6,141.3 44.1,141.3 45.6,141.3 47.1,141.3 48.6,141.3 50.1,141.3 51.6,141.3 53.1,141.3 54.6,141.3 56.1,141.3 57.6,141.3 59.1,141.3 60.6,141.3 62.1,141.3 63.6,141.3 65.1,141.3 66.6,141.3 68.1,141.3 69.6,141.3 21.2,142.7 22.7,142.7 24.2,142.7 25.7,142.7 27.2,142.7 28.7,142.7 30.2,142.7 80,142.7 81.5,142.7 83,142.7 84.5,142.7 86,142.7 87.5,142.7 89,142.7 39.6,142.8 41.1,142.8 42.6,142.8 44.1,142.8 45.6,142.8 47.1,142.8 48.6,142.8 50.1,142.8 51.6,142.8 53.1,142.8 54.6,142.8 56.1,142.8 57.6,142.8 59.1,142.8 60.6,142.8 62.1,142.8 63.6,142.8 65.1,142.8 66.6,142.8 68.1,142.8 69.6,142.8 21.2,144.2 22.7,144.2 24.2,144.2 25.7,144.2 27.2,144.2 28.7,144.2 30.2,144.2 80,144.2 81.5,144.2 83,144.2 84.5,144.2 86,144.2 87.5,144.2 89,144.2 39.6,144.3 41.1,144.3 42.6,144.3 44.1,144.3 45.6,144.3 47.1,144.3 48.6,144.3 50.1,144.3 51.6,144.3 53.1,144.3 54.6,144.3 56.1,144.3 57.6,144.3 59.1,144.3 60.6,144.3 62.1,144.3 63.6,144.3 65.1,144.3 66.6,144.3 68.1,144.3 69.6,144.3

## Polygon pours and split planes (outlines as drawn)
VIN+ on Top Layer "VIN+_L01_P000" (solid, remove dead copper, pour order 0): 97,120 110,120 110,150 0,150 0,21.819 12.681,21.819 13.5,21 13.5,16 18.5,16 18.5,25 16.5,25 14.5,27 14.5,37.5 16,39 18.5,39 18.5,49 24,49 24,40 68,40 68,48.5 95.5,48.5 95.5,57.5 68,57.5 68,66.5 24,66.5 24,57.5 18.5,57.5 18.5,71 13.5,71 13.5,80.5 18.5,80.5 18.5,91 13.5,91 13.5,103.5 18.5,103.5 18.5,113.5 13.5,113.5 13.5,126.543 18.5,126.543 18.5,137 24,137 24,128 68,128 68,136 97,136
OUT_W on Top Layer "OUT_W_L01_P057" (solid, remove dead copper, pour order 57): 81.5,47 81.5,15 96,15 96,47
OUT_V on Top Layer "OUT_V_L01_P053" (solid, remove dead copper, pour order 53): 81.5,90.5 81.5,58.5 96,58.5 96,90.5
OUT_U on Top Layer "OUT_U_L01_P038" (solid, remove dead copper, pour order 38): 81.5,135 81.5,103 96,103 96,135
PHASE_V on Top Layer "PHASE_V_L01_P031" (solid, remove dead copper, pour order 31): 80,90.5 80,59 69,59 69,70 65.71,70 65.71,67.5 58,67.5 58,70 53.67,70 53.67,67.5 46,67.5 46,70 41.681,70 41.681,67.5 34,67.5 34,70 29.667,70 29.667,67.5 24,67.5 24,71.219 26.5,73.719 26.5,78 24,80.5 24,88 69.5,88 69.5,90.5
PHASE_W on Top Layer "PHASE_W_L01_P030" (solid, remove dead copper, pour order 30): 80,47 69,47 69,38.5 62.332,38.5 62.332,36 58,36 58,38.5 50.317,38.5 50.317,36 46,36 46,38.5 38.303,38.5 38.303,36 34,36 34,38.5 26.34,38.5 26.34,27.34 24,25 24,18 69,18 69,15 80,15
PHASE_U on Top Layer "PHASE_U_L01_P015" (solid, remove dead copper, pour order 15): 80,135 69,135 69,126.5 62.332,126.5 62.332,124 58,124 58,126.5 50.343,126.5 50.343,124 46,124 46,126.5 38.303,126.5 38.303,124 34,124 34,126.5 26.314,126.5 26.314,115.314 24,113 24,106 69,106 69,103 80,103
GND on Top Layer "GND_L01_P008" (solid, remove dead copper, pour order 8): 26.365,102 26.365,104.5 34,104.5 34,102 38.5,102 38.5,104.5 46,104.5 46,102 50.5,102 50.5,104.5 58,104.5 58,102 62.5,102 62.5,104.5 68,104.5 68,102 97,102 97,116.738 110,116.738 110,0 0,0 0,19.888 11.455,19.888 12.5,18.844 12.5,15 19.5,15 19.5,48.412 22.5,48.412 22.5,13.5 26.289,13.5 26.289,16.5 34,16.5 34,13.5 38.303,13.5 38.303,16.5 46,16.5 46,13.5 50.317,13.5 50.317,16.5 58,16.5 58,13.5 62.332,13.5 62.332,16.5 68,16.5 68,13.5 97,13.5 97,92 65.684,92 65.684,89.5 58,89.5 58,92 53.696,92 53.696,89.5 46,89.5 46,92 41.656,92 41.656,89.5 34,89.5 34,92 29.5,92 29.5,89.5 22.5,89.5 22.5,58.572 19.5,58.572 19.5,92 14.5,92 14.5,102 19.5,102 19.5,136.193 22.5,136.193 22.5,102
OUT_W on Signal Layer 1 "OUT_W_L02_P058" (solid, remove dead copper, pour order 58): 81.5,47 81.5,15 96,15 96,47
OUT_V on Signal Layer 1 "OUT_V_L02_P054" (solid, remove dead copper, pour order 54): 81.5,90.5 81.5,58.5 96,58.5 96,90.5
OUT_U on Signal Layer 1 "OUT_U_L02_P050" (solid, remove dead copper, pour order 50): 81.5,135 81.5,103 96,103 96,135
PHASE_V on Signal Layer 1 "PHASE_V_L02_P035" (solid, remove dead copper, pour order 35): 80,90.5 80,59 69,59 69,70 65.71,70 65.71,67.5 58,67.5 58,70 53.67,70 53.67,67.5 46,67.5 46,70 41.681,70 41.681,67.5 34,67.5 34,70 29.667,70 29.667,67.5 24,67.5 24,71.219 26.5,73.719 26.5,78 24,80.5 24,88 69.5,88 69.5,90.5
PHASE_W on Signal Layer 1 "PHASE_W_L02_P029" (solid, remove dead copper, pour order 29): 80,47 69,47 69,38.5 62.332,38.5 62.332,36 58,36 58,38.5 50.317,38.5 50.317,36 46,36 46,38.5 38.303,38.5 38.303,36 34,36 34,38.5 26.34,38.5 26.34,27.34 24,25 24,18 69,18 69,15 80,15
PHASE_U on Signal Layer 1 "PHASE_U_L02_P019" (solid, remove dead copper, pour order 19): 80,135 69,135 69,126.5 62.332,126.5 62.332,124 58,124 58,126.5 50.343,126.5 50.343,124 46,124 46,126.5 38.303,126.5 38.303,124 34,124 34,126.5 26.314,126.5 26.314,115.314 24,113 24,106 69,106 69,103 80,103
GND on Signal Layer 1 "GND_L02_P012" (solid, remove dead copper, pour order 12): 26.365,102 26.365,104.5 34,104.5 34,102 38.5,102 38.5,104.5 46,104.5 46,102 50.5,102 50.5,104.5 58,104.5 58,102 62.5,102 62.5,104.5 68,104.5 68,102 97,102 97,116.738 110,116.738 110,0 0,0 0,19.888 11.455,19.888 12.5,18.844 12.5,15 19.5,15 19.5,48.209 22.5,48.209 22.5,13.5 26.289,13.5 26.289,16.5 34,16.5 34,13.5 38.303,13.5 38.303,16.5 46,16.5 46,13.5 50.317,13.5 50.317,16.5 58,16.5 58,13.5 62.332,13.5 62.332,16.5 68,16.5 68,13.5 97,13.5 97,92 65.684,92 65.684,89.5 58,89.5 58,92 53.696,92 53.696,89.5 46,89.5 46,92 41.656,92 41.656,89.5 34,89.5 34,92 29.5,92 29.5,89.5 22.5,89.5 22.5,58.547 19.5,58.547 19.5,92 14.5,92 14.5,102 19.5,102 19.5,136.22 22.5,136.22 22.5,102
VIN+ on Signal Layer 1 "VIN+_L02_P005" (solid, remove dead copper, pour order 5): 97,120 110,120 110,150 0,150 0,21.819 12.681,21.819 13.5,21 13.5,16 18.5,16 18.5,25 16.5,25 14.5,27 14.5,37.5 16,39 18.5,39 18.5,49 24,49 24,40 68,40 68,48.5 95.5,48.5 95.5,57.5 68,57.5 68,66.5 24,66.5 24,57.5 18.5,57.5 18.5,71 13.5,71 13.5,80.5 18.5,80.5 18.5,91 13.5,91 13.5,103.5 18.5,103.5 18.5,113.5 13.5,113.5 13.5,126.5 18.5,126.5 18.5,137 24,137 24,128 68,128 68,136 97,136
OUT_W on Signal Layer 2 "OUT_W_L03_P059" (solid, remove dead copper, pour order 59): 81.5,47 81.5,15 96,15 96,47
OUT_V on Signal Layer 2 "OUT_V_L03_P055" (solid, remove dead copper, pour order 55): 81.5,90.5 81.5,58.5 96,58.5 96,90.5
OUT_U on Signal Layer 2 "OUT_U_L03_P051" (solid, remove dead copper, pour order 51): 81.5,135 81.5,103 96,103 96,135
PHASE_V on Signal Layer 2 "PHASE_V_L03_P036" (solid, remove dead copper, pour order 36): 80,90.5 80,59 69,59 69,70 65.71,70 65.71,67.5 58,67.5 58,70 53.67,70 53.67,67.5 46,67.5 46,70 41.681,70 41.681,67.5 34,67.5 34,70 29.667,70 29.667,67.5 24,67.5 24,71.244 26.5,73.744 26.5,78 24,80.5 24,88 69.5,88 69.5,90.5
PHASE_W on Signal Layer 2 "PHASE_W_L03_P028" (solid, remove dead copper, pour order 28): 80,47 69,47 69,38.5 62.332,38.5 62.332,36 58,36 58,38.5 50.317,38.5 50.317,36 46,36 46,38.5 38.303,38.5 38.303,36 34,36 34,38.5 26.34,38.5 26.34,27.34 24,25 24,18 69,18 69,15 80,15
PHASE_U on Signal Layer 2 "PHASE_U_L03_P020" (solid, remove dead copper, pour order 20): 80,135 69,135 69,126.5 62.332,126.5 62.332,124 58,124 58,126.5 50.343,126.5 50.343,124 46,124 46,126.5 38.303,126.5 38.303,124 34,124 34,126.5 26.314,126.5 26.314,115.314 24,113 24,106 69,106 69,103 80,103
GND on Signal Layer 2 "GND_L03_P013" (solid, remove dead copper, pour order 13): 26.365,102 26.365,104.5 34,104.5 34,102 38.5,102 38.5,104.5 46,104.5 46,102 50.5,102 50.5,104.5 58,104.5 58,102 62.5,102 62.5,104.5 68,104.5 68,102 97,102 97,116.738 110,116.738 110,0 0,0 0,19.888 11.455,19.888 12.5,18.844 12.5,15 19.5,15 19.5,48.412 22.5,48.412 22.5,13.5 26.289,13.5 26.289,16.5 34,16.5 34,13.5 38.303,13.5 38.303,16.5 46,16.5 46,13.5 50.317,13.5 50.317,16.5 58,16.5 58,13.5 62.332,13.5 62.332,16.5 68,16.5 68,13.5 97,13.5 97,92 65.684,92 65.684,89.5 58,89.5 58,92 53.696,92 53.696,89.5 46,89.5 46,92 41.656,92 41.656,89.5 34,89.5 34,92 29.5,92 29.5,89.5 22.5,89.5 22.5,58.522 19.5,58.522 19.5,92 14.5,92 14.5,102 19.5,102 19.5,136.22 22.5,136.22 22.5,102
VIN+ on Signal Layer 2 "VIN+_L03_P006" (solid, remove dead copper, pour order 6): 97,120 110,120 110,150 0,150 0,21.819 12.681,21.819 13.5,21 13.5,16 18.5,16 18.5,25 16.5,25 14.5,27 14.5,37.5 16,39 18.5,39 18.5,49 24,49 24,40 68,40 68,48.5 95.5,48.5 95.5,57.5 68,57.5 68,66.5 24,66.5 24,57.5 18.5,57.5 18.5,71 13.5,71 13.5,80.5 18.5,80.5 18.5,91 13.5,91 13.5,103.5 18.5,103.5 18.5,113.5 13.5,113.5 13.5,126.5 18.5,126.5 18.5,137 24,137 24,128 68,128 68,136 97,136
OUT_W on Bottom Layer "OUT_W_L04_P060" (solid, remove dead copper, pour order 60): 81.5,47 81.5,15 96,15 96,47
OUT_V on Bottom Layer "OUT_V_L04_P056" (solid, remove dead copper, pour order 56): 81.5,90.5 81.5,58.5 96,58.5 96,90.5
OUT_U on Bottom Layer "OUT_U_L04_P052" (solid, remove dead copper, pour order 52): 81.5,135 81.5,103 96,103 96,135
PHASE_V on Bottom Layer "PHASE_V_L04_P037" (solid, remove dead copper, pour order 37): 80,90.5 80,59 69,59 69,70 65.71,70 65.71,67.5 58,67.5 58,70 53.67,70 53.67,67.5 46,67.5 46,70 41.681,70 41.681,67.5 34,67.5 34,70 29.667,70 29.667,67.5 24,67.5 24,71.244 26.5,73.744 26.5,78 24,80.5 24,88 69.5,88 69.5,90.5
PHASE_W on Bottom Layer "PHASE_W_L04_P024" (solid, remove dead copper, pour order 24): 80,47 69,47 69,38.5 62.5,38.5 62.5,36 58,36 58,38.5 50.5,38.5 50.5,36 46,36 46,38.5 38.5,38.5 38.5,36 34,36 34,38.5 26.5,38.5 26.5,27.5 24,25 24,18 69,18 69,15 80,15
PHASE_U on Bottom Layer "PHASE_U_L04_P021" (solid, remove dead copper, pour order 21): 80,135 69,135 69,126.5 62.332,126.5 62.332,124 58,124 58,126.5 50.343,126.5 50.343,124 46,124 46,126.5 38.303,126.5 38.303,124 34,124 34,126.5 26.314,126.5 26.314,115.314 24,113 24,106 69,106 69,103 80,103
GND on Bottom Layer "GND_L04_P014" (solid, remove dead copper, pour order 14): 26.365,102 26.365,104.5 34,104.5 34,102 38.5,102 38.5,104.5 46,104.5 46,102 50.5,102 50.5,104.5 58,104.5 58,102 62.5,102 62.5,104.5 68,104.5 68,102 97,102 97,116.738 110,116.738 110,0 0,0 0,19.888 11.455,19.888 12.5,18.844 12.5,15 19.5,15 19.5,48.26 22.5,48.26 22.5,13.5 26.289,13.5 26.289,16.5 34,16.5 34,13.5 38.303,13.5 38.303,16.5 46,16.5 46,13.5 50.317,13.5 50.317,16.5 58,16.5 58,13.5 62.332,13.5 62.332,16.5 68,16.5 68,13.5 97,13.5 97,92 65.684,92 65.684,89.5 58,89.5 58,92 53.696,92 53.696,89.5 46,89.5 46,92 41.656,92 41.656,89.5 34,89.5 34,92 29.5,92 29.5,89.5 22.5,89.5 22.5,58.572 19.5,58.572 19.5,92 14.5,92 14.5,102 19.5,102 19.5,136.22 22.5,136.22 22.5,102
VIN+ on Bottom Layer "VIN+_L04_P007" (solid, remove dead copper, pour order 7): 97,120 110,120 110,150 0,150 0,21.819 12.681,21.819 13.5,21 13.5,16 18.5,16 18.5,25 16.5,25 14.5,27 14.5,37.5 16,39 18.5,39 18.5,49 24,49 24,40 68,40 68,48.5 95.5,48.5 95.5,57.5 68,57.5 68,66.5 24,66.5 24,57.5 18.5,57.5 18.5,71 13.5,71 13.5,80.5 18.5,80.5 18.5,91 13.5,91 13.5,103.5 18.5,103.5 18.5,113.5 13.5,113.5 13.5,126.5 18.5,126.5 18.5,137 24,137 24,128 68,128 68,136 97,136

## Keep-outs
Keep-Out Layer:
  the board outline again, w0.254

## Silkscreen, mask and mechanical layers (free items; w line width, h text height)
Top Overlay:
  text "VESC_MotorPower" at 6.277,21.057 h3 r90

## Dimensions
0,150 to 110,150 on Top Paste
19,147.5 to 0,150 on Top Paste
0,150 to 0,0 on Top Paste
22.5,24 to 0,0 on Top Paste
0,150 to 24,137.5 on Top Paste

## Text inside footprints (layer, text, board x,y; h text height)
J5: Top Assembly "1" at 107.002,177.61 h1.52 r180
J6: Top Assembly "1" at 74.998,16.389 h1.52
J7: Top Assembly "1" at 107.002,89.61 h1.52 r180
J31: Top Assembly "1" at 18.998,60.39 h1.52; Top Assembly "1" at 22.872,84.901 h1.52
J32: Top Assembly "1" at 22.872,40.9 h1.52; Top Assembly "1" at 18.998,16.389 h1.52
J33: Top Assembly "1" at 18.998,-27.611 h1.52; Top Assembly "1" at 22.872,-3.1 h1.52